# Altium PCB NDMK.PcbDoc
Units mm, origin at the board's own origin, x right, y up, seen from the top; angles counter-clockwise.
Board outline 50 x 50 mm, 2 copper layers (Top Layer, Bottom Layer); 34 components, 23 nets, 122 pads, 56 vias.
Unrouted connection lines stored in the file: 2.
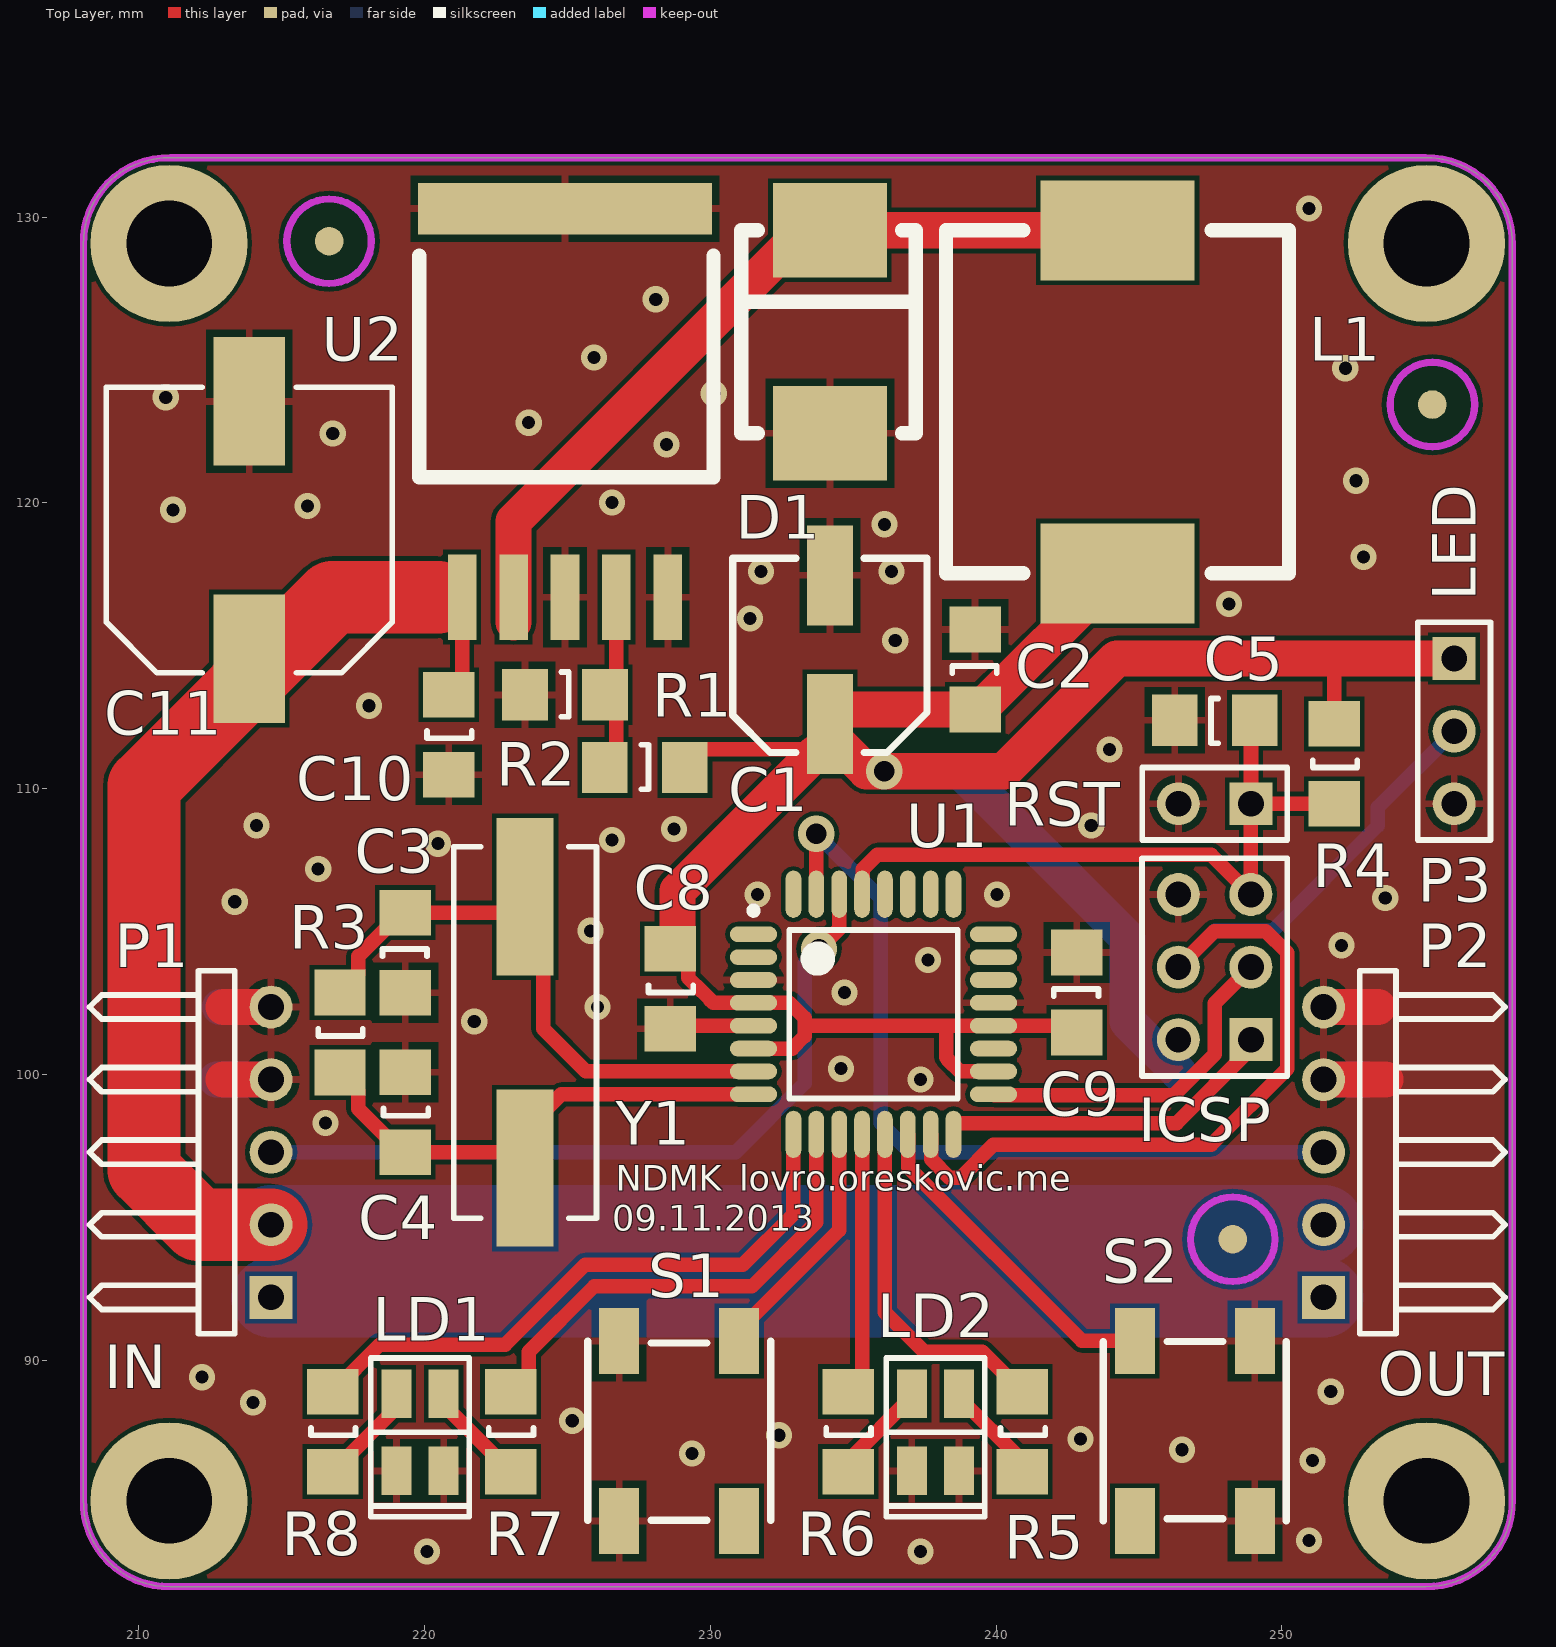
[diagram p0: Top Layer view]
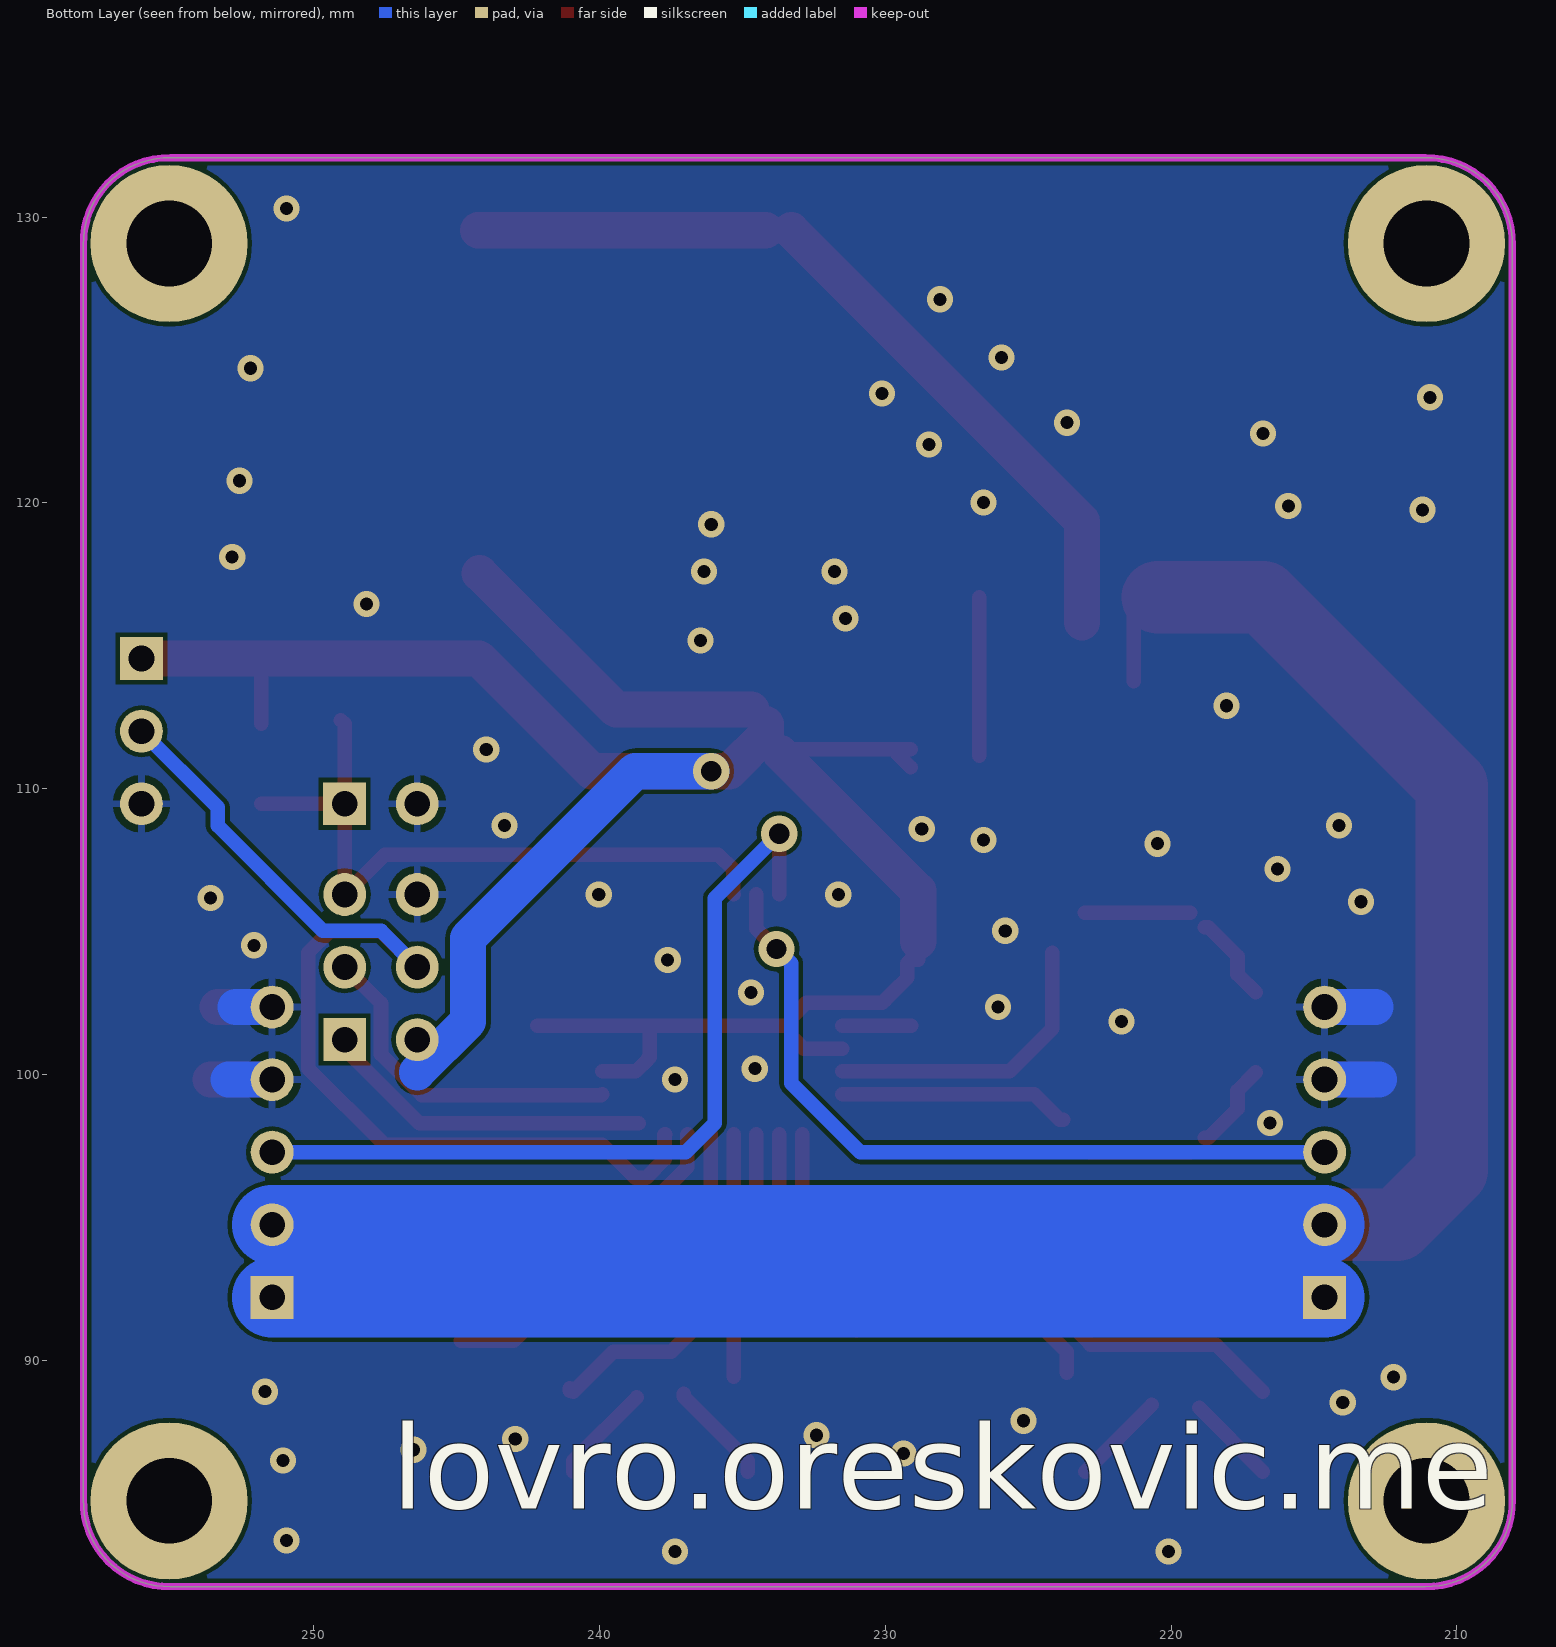
[diagram p1: Bottom Layer view, seen from below]
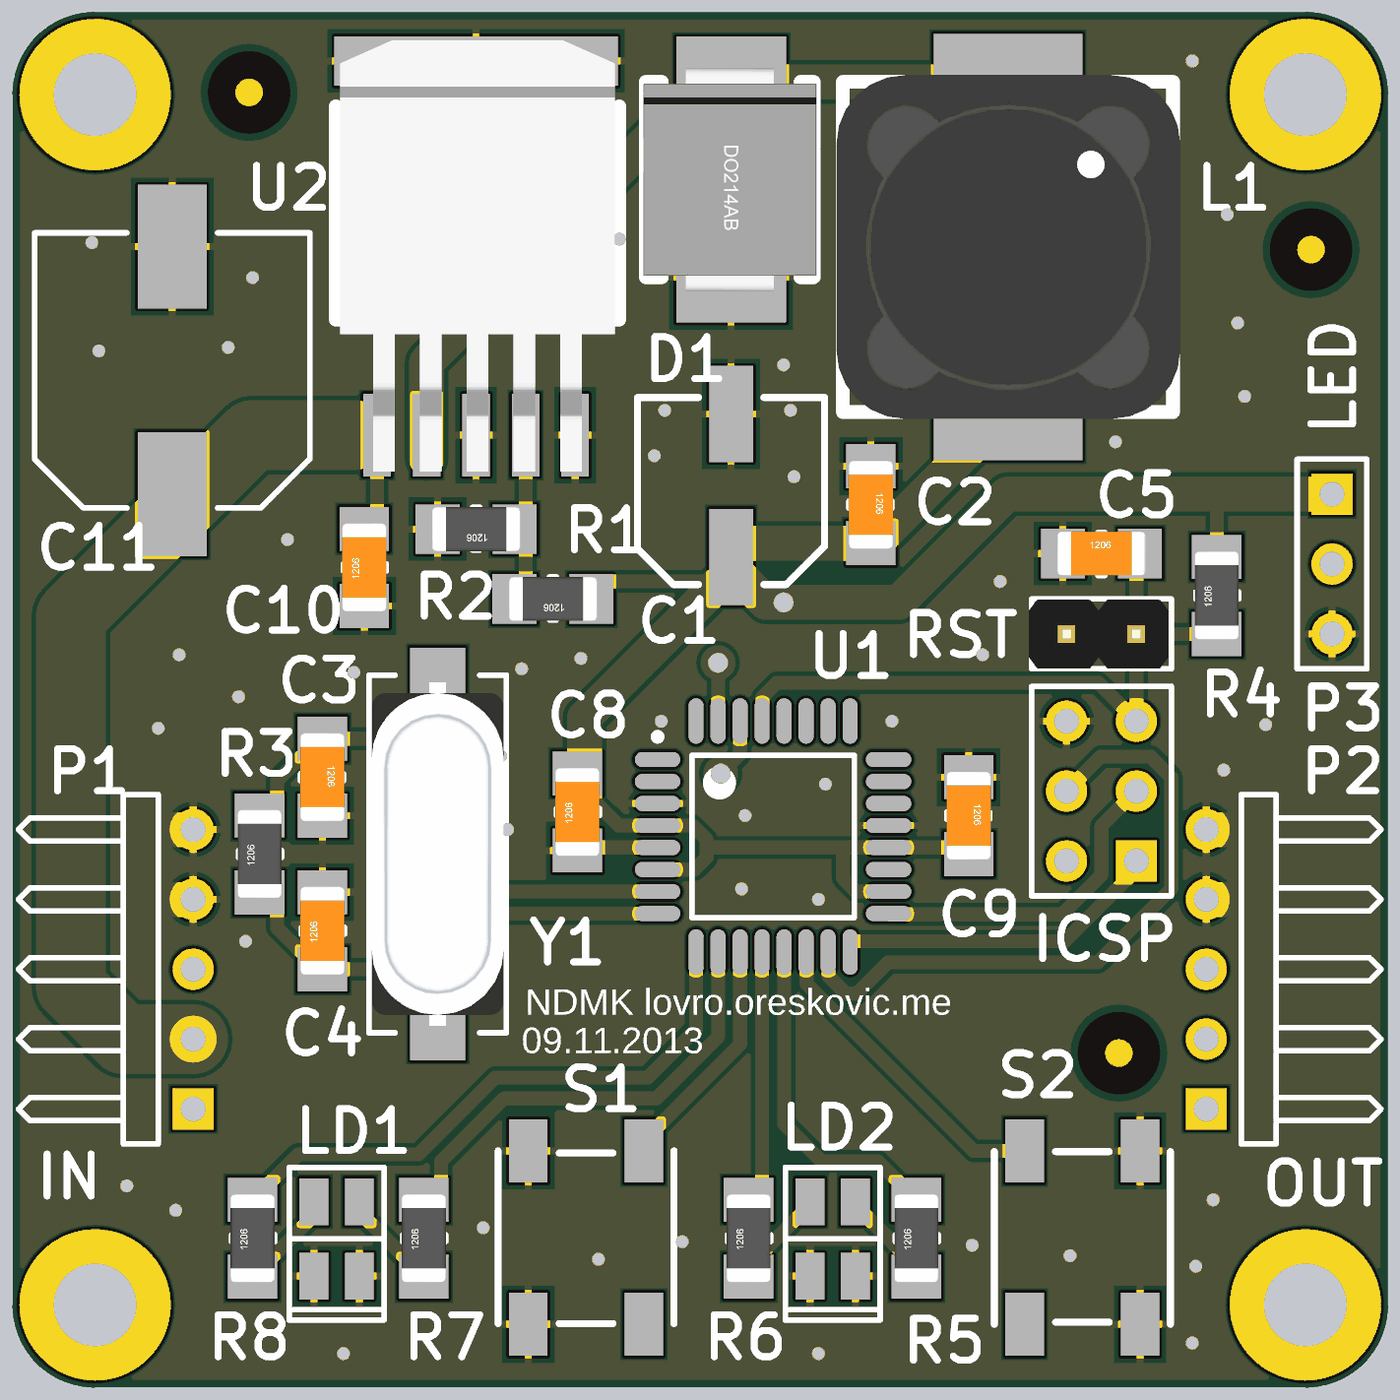
[diagram p2: 3D render of the assembled board from above, using the file's embedded part models]

## Layer stack, top to bottom
Top Layer: signal copper 0.0356
Dielectric: dielectric 0.32, FR-4, Dk 4.8
Bottom Layer: signal copper 0.0356

## Board outline
208.064,85.128 ccw(c211.049,85.065) 211.112,82.08 255.016,82.08 ccw(c255.079,85.065) 258.064,85.128 258.064,129.032 ccw(c255.079,129.095) 255.016,132.08 211.112,132.08 ccw(c211.049,129.095) 208.064,129.032

## Design rules (kind name [scope] priority, off if disabled: settings)
Clearance [All] p1: gap=0.152
HoleSize [All] p1: absolutevalues=TRUE maxlimit=25.4 minlimit=0.025 maxpercent=80.000 minpercent=20.000
MinimumSolderMaskSliver [All] p1: minsoldermaskwidth=0.152
PolygonConnect [IsVia and InNet(GND)] p1: connectstyle=Direct reliefconductorwidth=0.254 reliefentries=4 polygonreliefangle="90 Angle" airgapwidth=0.254
PolygonConnect PolygonConnect_1 [All] p2: connectstyle=Relief reliefconductorwidth=0.254 reliefentries=4 polygonreliefangle="90 Angle" airgapwidth=0.254
RoutingVias [All] p1: holewidth=0.711 width=1.27 viastyle="Through Hole" minholewidth=0.406 minwidth=0.914 maxholewidth=0.711 maxwidth=1.27
SolderMaskExpansion [All] p1: expansion=0.102
Width [All] p1: maxlimit=3.81 minlimit=0.203 preferedwidth=0.254 minimp=50.000000 maximp=50.000000 favimp=50.000000
26 further rules are at their usual default settings.

## Classes and differential pairs
component class NDMK: C1 C2 C3 C4 C5 C8 C9 C10 C11 D1 ICSP L1 LD1 LD2 P1 P2 P3 P4 R1 R2 R3 R4 R5 R6 R7 R8 RST S1 S2 U1 U2 Y1

## Components (designator, comment, footprint, x,y, rotation, side; value= is the part's Value field where it differs from the comment)
C1 "100uF 35V" CAPSMD0605 234.188,112.268 r270 top
C2 "100n" C1206 239.268,115.57 r270 top
C3 "18pF" C1206 219.329,105.664 r270 top
C4 "18pF" C1206 219.329,97.282 r90 top
C5 "100n" C1206 246.25,112.395 r0 top
C8 "100n" C1206 228.6,101.6 r90 top
C9 "100n" C1206 242.824,104.267 r270 top
C10 "100n" C1206 220.853,110.49 r90 top
C11 "100uF 35V" "SMD 1010" 213.868,114.554 r180 top
D1 "SK54C" D-SMC 234.188,122.44 r90 top
FIDUCIAL1 "THING" FIDUCIAL 255.27,123.444 r90 top
FIDUCIAL2 "THING" FIDUCIAL 216.662,129.159 r90 top
FIDUCIAL3 "THING" FIDUCIAL 248.285,94.234 r90 top
ICSP "Header 3X2" HDR2X3 248.92,101.219 r90 top
L1 "SMFS1270-330" smd1212 238.252,129.54 r270 top
LD1 "Bicolor LED" 11-22SURSYGC 219.021,86.128 r90 top
LD2 "Bicolor LED" 11-22SURSYGC 237.055,86.128 r90 top
P1 "Header 5H" HDR1X5H 214.63,92.202 r90 top
P2 "Header 5H" HDR1X5H 251.46,92.202 r90 top
P3 "Header 3" HDR1X3 256.032,114.554 r270 top
R1 "3K3" R1206 224.917,113.284 r180 top
R2 "10K" R1206 227.711,110.744 r180 top
R3 "1M" R1206 217.043,101.473 r90 top
R4 "10K" R1206 251.841,110.871 r90 top
R5 "51R" R1206 240.919,87.503 r90 top
R6 "51R" R1206 234.823,87.503 r90 top
R7 "51R" R1206 223.012,87.503 r90 top
R8 "51R" R1206 216.789,87.503 r90 top
RST "Reset" HDR1X2 248.923,109.474 r180 top
S1 "SW-PB" "MULTICOMP - MC32850 - SWITCH" 231.013,90.678 r270 top
S2 "SW-PB" "MULTICOMP - MC32850 - SWITCH" 244.856,84.378 r90 top
U1 "ATmega328-AU" 32A_N 235.712,102.108 r0 top
U2 "TS2596" TO-263-5L 224.917,130.302 r0 top
Y1 "20MHz" xtal 223.52,101.473 r90 top

## Footprints (in the part's own frame and the unit in brackets; to place one, negate y for a bottom-side part, rotate by r counter-clockwise, add the part's x,y. Pads: shape width x height; smd on the part's side, far side on the other; paste and mask are expansions set on the pad)
11-22SURSYGC [mm] "Bicolor LED - Red and Green 11-22SURSYGC/S530-A2/TR8"
  rect 1.7x1.05 smd: 1(0,0) 2(2.7,0) 3(0,-1.65) 4(2.7,-1.65)
  silkscreen extent -1.6,-2.55 3.95,0.9, body extent -0.15,-2.32 2.85,0.68, height 1.2
32A_N [mm] "Thin QFP, 32-Leads, Body 7x7mm, Pitch 0.8mm, IPC Medium Density"
  oval 1.65x0.55 smd: 1(-4.2,2.8) 2(-4.2,2) 3(-4.2,1.2) 4(-4.2,0.4) 5(-4.2,-0.4) 6(-4.2,-1.2) 7(-4.2,-2) 8(-4.2,-2.8) 17(4.2,-2.8) 18(4.2,-2) 19(4.2,-1.2) 20(4.2,-0.4) 21(4.2,0.4) 22(4.2,1.2) 23(4.2,2) 24(4.2,2.8)
  oval 0.55x1.65 smd: 9(-2.8,-4.2) 10(-2,-4.2) 11(-1.2,-4.2) 12(-0.4,-4.2) 13(0.4,-4.2) 14(1.2,-4.2) 15(2,-4.2) 16(2.8,-4.2) 25(2.8,4.2) 26(2,4.2) 27(1.2,4.2) 28(0.4,4.2) 29(-0.4,4.2) 30(-1.2,4.2) 31(-2,4.2) 32(-2.8,4.2)
  silkscreen extent -4.32,-2.95 2.95,3.75, body extent -3.5,-3.5 3.5,3.5, height 1.2
C1206 [mm]
  rect 1.6x1.8 smd: 1(0,0) 2(2.8,0)
  silkscreen extent 1.27,-0.8 1.53,0.76, body extent -0.2,-0.8 3,0.8, height 1
CAPSMD0605 [mm]
  rect 3.5x1.6 smd: 1(0,0) 2(-5.2,0)
  silkscreen extent -5.8,-3.4 1,3.4, body extent -5.63,-3.22 0.82,3.22, height 6
D-SMC [mm]
  rect 3.3x4 smd: 1(0,0) 2(7.1,0)
  silkscreen extent 0,-3 7.1,3.1, body extent -0.51,-3.1 7.61,3.2, height 2.62
FIDUCIAL [mm]
  round 1 smd paste-10 mask+1: ""(0,0)
  Top Layer keep-out circle w0.254: c0,0 r1.478
HDR1X2 [mm]
  rect 1.5x1.5 hole 0.9: 1(0,0)
  round 1.5 hole 0.9: 2(2.54,0)
  silkscreen extent -1.27,-1.27 3.81,1.27, body extent -1.16,-1.25 3.92,1.25, height 8.2
HDR1X3 [mm] "Connector; Header; 3 Position"
  rect 1.5x1.5 hole 0.9: 1(0,0)
  round 1.5 hole 0.9: 2(2.54,0) 3(5.08,0)
  silkscreen extent -1.27,-1.27 6.35,1.27
HDR1X5H [mm] "Connector; Header; 5 Position; Right Angle"
  rect 1.5x1.5 hole 0.9: 1(0,0)
  round 1.5 hole 0.9: 2(2.54,0) 3(5.08,0) 4(7.62,0) 5(10.16,0)
  silkscreen extent -1.27,1.27 11.43,6.35
HDR2X3 [mm]
  rect 1.5x1.5 hole 0.9: 1(0,0)
  round 1.5 hole 0.9: 2(0,2.54) 3(2.54,0) 4(2.54,2.54) 5(5.08,0) 6(5.08,2.54)
  silkscreen extent -1.27,-1.27 6.35,3.81
"MULTICOMP - MC32850 - SWITCH" [mm]
  rect 2.3x1.4 smd: 1(0,0) 1(6.3,0) 2(0,-4.2) 2(6.3,-4.2)
  silkscreen extent 0,-5.3 6.28,1.1
R1206 [mm] "Chip Resistor; Body 3.2 x 1.6 mm (LxW typ)"
  rect 1.6x1.8 smd: 1(-1.4,0) 2(1.4,0)
  silkscreen extent -0.13,-0.8 0.13,0.76, body extent -1.6,-0.8 1.6,0.8, height 1
smd1212 [mm] "SMD 12x12 inductor"
  rect 3.5x5.4 smd: 1(0,6) 2(12,6)
  silkscreen extent 0,0 12,12, body extent -0.25,-0.24 12.25,12.26, height 8.58
"SMD 1010" [mm]
  rect 2.5x4.5 smd: 1(0,0) 2(0,-9)
  silkscreen extent -5,-9.5 5,0.5
TO-263-5L [mm]
  rect 1x3 smd: 1(-3.6,-13.6) 2(-1.8,-13.6) 3(0,-13.6) 4(1.8,-13.6) 5(3.6,-13.6)
  rect 10.3x1.8 smd: 3(0,0)
  silkscreen extent -5.1,-9.4 5.2,-1.65, body extent -4.95,-14.92 5.05,0.75, height 4.88
xtal [mm]
  rect 5.5x2 smd: 1(-4.75,0) 2(4.75,0)
  silkscreen extent -6.5,-2.5 6.5,2.5, body extent -6.25,-2.4 6.25,2.4, height 3.92

## Part data
C1 C11: library part "CapPol _1", "Polarised Capacitator"
C2 C5 C8 C9 C10: library part Cap, "Capacitor"
C3 C4: library part "Cap Semi", "Capacitor (Semiconductor SIM Model)"
D1: library part Diode, "Default Diode"
FIDUCIAL1 FIDUCIAL2 FIDUCIAL3: "Something"
ICSP: "Header, 3-Pin, Dual row"
L1: library part Inductor, "Inductor"
LD1 LD2: "11-22SURSYGC/S530-A2/TR8"
P1 P2: "Header, 5-Pin, Right Angle"
P3: "Header, 3-Pin"
R1 R2 R3 R4 R5 R6 R7 R8: library part Res2, "Resistor"
RST: library part "Header 2", "DO NOT POPULATE"
S1 S2: "Switch"
U1: "8-bit AVR Microcontroller, 32KB Flash, 1KB EEPROM, 2KB SRAM, 32-pin TQFP, Industrial Grade (-40°C to 85°C)"
U2: "3A / 150KHz Buck DC-DC Converter"
Y1: library part XTAL, "Crystal Oscillator"

## Free pads (board coordinates)
  round 5.5 hole 3: ""(211.064,85.08) ""(211.064,129.08) ""(255.064,85.08) ""(255.064,129.08)

## Via types
v1: diameter 0.914, hole 0.457, Top Layer to Bottom Layer, 53 vias
v2: diameter 1.27, hole 0.711, Top Layer to Bottom Layer, 3 vias

## Nets (pads, with @x,y where several pads share a name; then routed paths per layer and width w, separated by ;. In a path a pad name is that pad's centre, name@x,y a point inside that pad or via, vN(x,y) a via of type N, cw(c..) or ccw(c..) an arc to the next point about the centre after c; other vN are vias at no path point)
5V: C1.1 C2.2 C8.2 C9.2 ICSP.2 L1.2 P3.1 R2.1 R4.2 U1.4 U1.6 U1.18 U1.20 | length 87.7
  Top Layer w0.508: C8.2@228.854,104.013 229.108,104.013 229.235,103.886 229.235,103.378 229.705,102.908 229.71,102.908 230.008,102.61 230.008,102.605 230.105,102.508 U1.4 232.772,102.508 233.299,101.981 233.299,101.346 232.861,100.908 U1.6 ; R2.1@229.108,111.379 233.169,111.379 ; R2.1 R2.1@229.619,111.252 ; 233.572,101.708 U1.20 C9.2@242.189,101.708 ; 238.252,101.708 238.252,100.612 238.315,100.549 238.315,100.521 238.728,100.108 U1.18 ; R4.2 251.841,114.554
  Top Layer w1.27: C8.2@228.854,104.654 228.854,106.426 C1.1@233.68,111.252 ; C1.1 234.188,111.887 235.458,110.617 236.474,110.617 240.284,110.617 244.221,114.554 251.841,114.554 P3.1 ; C1.1@234.69,112.77 C2.2 239.425,112.77 L1.2@244.195,117.54
  Bottom Layer w1.27: v2(236.093,110.617) 238.76,110.617 244.602,104.775 244.602,101.854 246.38,100.076
/RESET: C5.2 ICSP.5 R4.1 RST.1 U1.29 | length 24.3
  Top Layer w0.508: U1.29 235.329,106.325 235.329,107.182 235.843,107.696 247.523,107.696 ICSP.5 RST.1@248.92,109.471 ; C5.2 248.923,112.268 RST.1 R4.1@251.838,109.474
BUTTON1: S1.1 U1.11 | length 8.3
  Top Layer w0.508: S1.1@231.013,91.059 234.512,94.558 U1.11
BUTTON2: S2.1 U1.14 | length 11.6
  Top Layer w0.508: U1.14 236.929,97.891 236.929,96.756 243.007,90.678 S2.1@244.856,90.678
GND: C1.2 C2.1 C3.2 C4.2 C5.1 C8.1 C9.1 C10.1 C11.2 D1.1 ICSP.6 LD1.1 LD1.3 LD2.1 LD2.3 P1.4 P1.5 P2.4 P2.5 P3.3 R1.2 RST.2 S1.2 S2.2 U1.3 U1.5 U1.21 U2.3 U2.5 | length 16.3
  Top Layer w0.508: C8.1@229.089,101.708 U1.5
  Top Layer w1.27: 212.979,99.822 P1.4 ; 212.979,102.362 P1.5 ; P2.4 253.619,99.822 ; P2.5 253.365,102.362
  Bottom Layer w1.27: 212.725,99.822 P1.4 ; 212.852,102.362 P1.5 ; P2.4 252.984,99.822 ; P2.5 252.73,102.362
  other v1: 220.091,83.312 237.363,83.312 250.952,83.693 251.079,86.487 229.362,86.741 246.507,86.868 242.951,87.249 232.41,87.376 225.171,87.884 213.995,88.519 251.714,88.9 212.217,89.408 216.535,98.298 237.363,99.822 234.569,100.203 221.742,101.854 226.06,102.362 234.696,102.87 237.617,104.013 252.095,104.521 225.806,105.029 213.36,106.045 253.619,106.172 231.648,106.299 240.03,106.299 216.281,107.188 220.472,108.077 226.568,108.204 228.727,108.585 214.122,108.712 243.332,108.712 243.967,111.379 218.059,112.903 236.474,115.189 231.394,115.951 248.158,116.459 231.775,117.602 236.347,117.602 252.857,118.11 236.093,119.253 211.201,119.761 215.9,119.888 226.568,120.015 252.603,120.777 228.473,122.047 216.789,122.428 223.647,122.809 210.947,123.698 230.124,123.825 252.222,124.714 225.933,125.095 228.092,127.127 250.952,130.302
LED1G: R7.2 U1.10 | length 15.8
  Top Layer w0.508: R7.2@223.647,89.563 223.647,90.297 225.933,92.583 231.459,92.583 233.712,94.836 U1.10
LED1R: R8.2 U1.9 | length 21.5
  Top Layer w0.508: R8.2 218.437,90.551 222.823,90.551 225.617,93.345 231.144,93.345 232.912,95.113 U1.9
LED2G: R5.2 U1.13 | length 12.3
  Top Layer w0.508: U1.13 236.112,91.675 237.49,90.297 239.525,90.297 R5.2 ; R5.2@241.046,88.928 R5.2@241.046,89.027
LED2R: R6.2 U1.12 | length 8.5
  Top Layer w0.508: R6.2@235.312,89.417 U1.12
MISO: ICSP.1 U1.16 | length 11.7
  Top Layer w0.508: U1.16@238.633,98.298 246.316,98.298 248.92,100.902 ICSP.1
MOSI: ICSP.4 P3.2 U1.15 | length 37.3
  Top Layer w0.508: U1.15 237.729,97.891 237.729,97.034 238.37,96.393 238.76,96.393 239.903,97.536 247.523,97.536 250.19,100.203 250.19,104.268 249.441,105.017 247.638,105.017 ICSP.4
  Bottom Layer w0.508: ICSP.4 247.65,105.029 249.682,105.029 253.365,108.712 253.365,109.347 P3.2
NetC3_1: C3.1 R3.2 U1.7 Y1.2 | length 17.4
  Top Layer w0.508: R3.2 217.678,103.508 217.678,104.14 218.694,105.156 C3.1@218.821,105.156 ; C3.1 Y1.2@223.017,105.664 ; Y1.2@224.155,104.267 224.155,101.6 225.647,100.108 U1.7
NetC4_1: C4.1 R3.1 U1.8 Y1.1 | length 14.7
  Top Layer w0.508: R3.1 217.678,99.438 217.678,98.806 218.694,97.79 C4.1@218.821,97.79 ; C4.1 Y1.1@222.873,97.282 ; Y1.1@223.774,98.419 223.895,98.419 224.784,99.308 U1.8
NetD1_2: D1.2 L1.1 U2.2 | length 28
  Top Layer w1.27: U2.2@223.117,115.824 223.117,119.358 D1.2@233.299,129.54 ; D1.2 L1.1
NetLD1_2: LD1.2 R8.1 | length 3.2
  Top Layer w0.508: R8.1 LD1.2@219.021,88.335
NetLD1_4: LD1.4 R7.1 | length 3.3
  Top Layer w0.508: LD1.4@220.671,88.444 R7.1
NetLD2_2: LD2.2 R6.1 | length 3.6
  Top Layer w0.508: R6.1 234.823,86.485 237.055,88.717 LD2.2
NetLD2_4: LD2.4 R5.1 | length 3.5
  Top Layer w0.508: LD2.4@238.705,88.699 240.919,86.485 R5.1
NetR1_1: R1.1 R2.2 U2.4 | length 5.6
  Top Layer w0.508: R2.2@226.717,111.15 U2.4
RX: P1.3 U1.30 | length 26.8
  Top Layer w0.508: v2(233.807,104.394) 234.512,105.099 U1.30
  Bottom Layer w0.508: P1.3 230.886,97.282 233.299,99.695 233.299,103.886 v2(233.807,104.394)
SCK: ICSP.3 U1.17 | length 11.9
  Top Layer w0.508: U1.17 239.944,99.276 246.216,99.276 247.65,100.71 247.65,102.489 ICSP.3
TX: P2.3 U1.31 | length 29.1
  Top Layer w0.508: U1.31 v2(233.712,108.426)
  Bottom Layer w0.508: v2(233.712,108.426) 235.966,106.172 235.966,98.298 236.982,97.282 P2.3
VIN: C10.2 C11.1 P1.1 P1.2 P2.1 P2.2 U2.1 | length 108
  Top Layer w0.508: U2.1@221.107,116.332 221.317,116.122 C10.2@221.317,113.754
  Top Layer w2.54: P1.2 212.09,94.742 210.185,96.647 210.185,110.109 216.778,116.702 220.472,116.702
  Bottom Layer w2.794: P1.1 P2.1 ; P1.2 P2.2
pads on no net: FIDUCIAL1. FIDUCIAL2. FIDUCIAL3. U1.1 U1.2 U1.19 U1.22 U1.23 U1.24 U1.25 U1.26 U1.27 U1.28 U1.32

## Polygon pours and split planes (outlines as drawn)
GND on Bottom Layer "Top Overlay-No Net 1" (solid, pour order 2): 208.064,82.08 258.064,82.08 258.064,132.08 208.064,132.08
GND on Top Layer "Top Overlay-No Net" (solid, remove dead copper, pour order 4): 208.064,82.08 258.064,82.08 258.064,132.08 208.064,132.08

## Keep-outs
Keep-Out Layer:
  the board outline again, w0.254

## Silkscreen, mask and mechanical layers (free items; w line width, h text height)
Top Overlay:
  text "LED" at 256.794,116.586 h1.52 r90
  text "NDMK" at 226.695,95.631 h1.52
  text "lovro.oreskovic.me" at 231.013,95.631 h1.52
  text "09.11.2013" at 226.568,94.234 h1.52
  text "IN" at 208.788,89.027 h1.52
  text "OUT" at 253.365,88.773 h1.52
Bottom Overlay:
  text "lovro.oreskovic.me" at 247.269,83.82 h5.08
Bottom Solder:
  rectangle: 227.711,117.221 237.711,127.221
  rectangle: 239.711,105.221 249.711,115.221
  rectangle: 215.711,93.221 225.711,103.221
  rectangle: 227.711,93.221 237.711,103.221
  rectangle: 239.711,93.221 249.711,103.221

## Text inside footprints (layer, text, board x,y; h text height)
LD1: Mechanical 13 "GREEN" at 220.811,90.653 h0.52 r90; Mechanical 13 "RED" at 219.236,90.653 h0.52 r90
LD2: Mechanical 13 "RED" at 237.27,90.653 h0.52 r90; Mechanical 13 "GREEN" at 238.845,90.653 h0.52 r90